# EAGLE board mega_pin_out___relay (EAGLE 7.7.0)
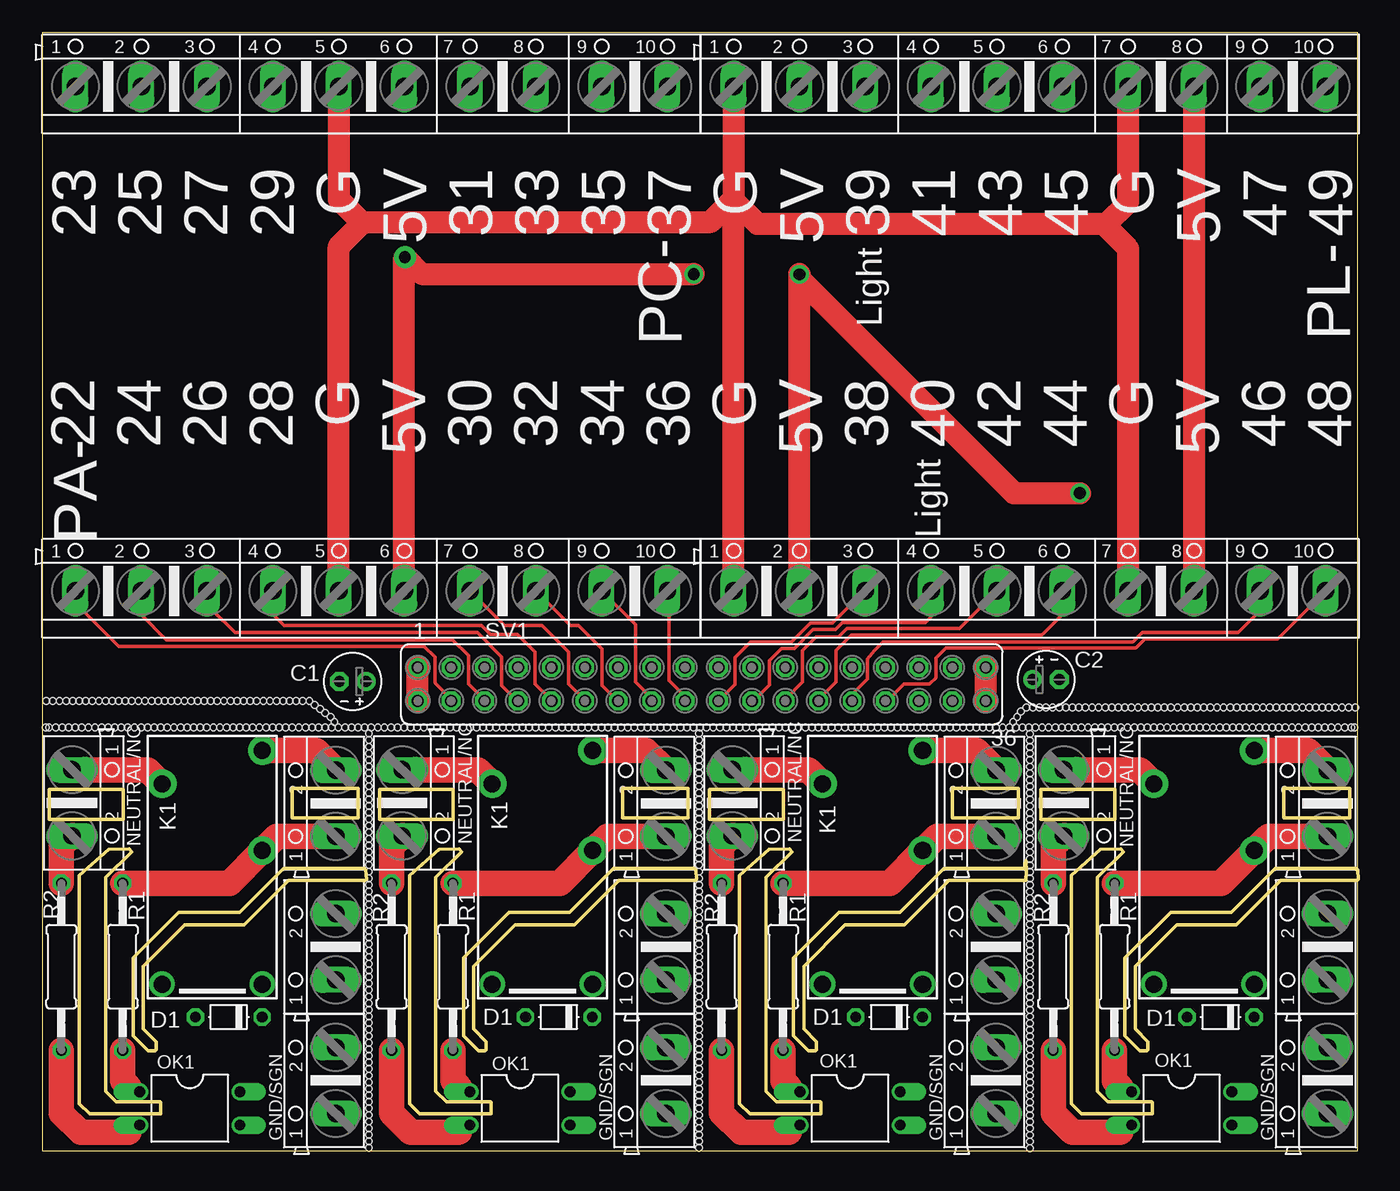
[diagram p0: board, top side]
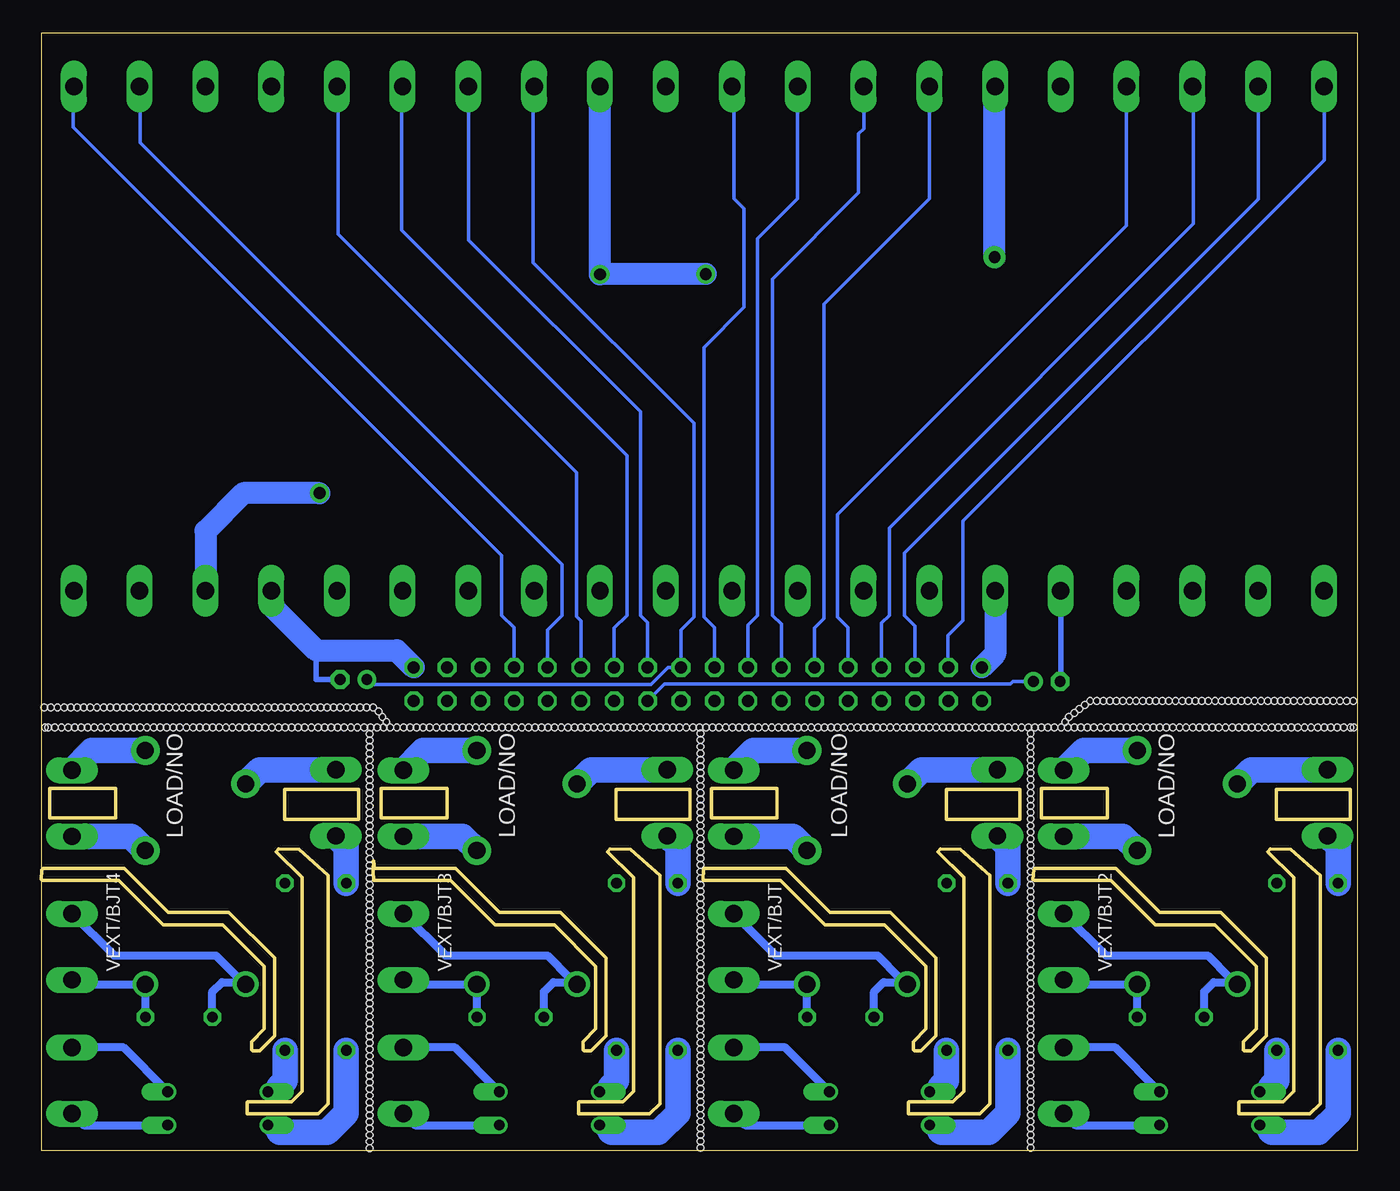
[diagram p1: board, bottom side, seen from below]

Size 100.03 x 85 mm. Coordinates in mm from the lower left corner, seen from the top.
Outline: 24.49,21.49 24.48,21.49
Outline: 24.48,21.49 18.33,21.49 14.98,18.14 10.37,18.14 6.91,14.68 6.91,8.74 8.05,7.6 8.56,7.6 8.64,7.68 8.64,8.31 7.68,9.27 7.68,14.04 10.83,17.19 15.35,17.19 18.73,20.57 24.55,20.57 24.63,20.65 24.59,21.38 24.48,21.49
Outline: 49.59,21.49 49.58,21.49
Outline: 49.58,21.49 43.43,21.49 40.08,18.14 35.47,18.14 32.01,14.68 32.01,8.74 33.15,7.6 33.66,7.6 33.74,7.68 33.74,8.31 32.78,9.27 32.78,14.04 35.93,17.19 40.45,17.19 43.83,20.57 49.65,20.57 49.73,20.65 49.69,21.38 49.58,21.49
Outline: 74.69,21.49 74.68,21.49
Outline: 74.68,21.49 68.53,21.49 65.18,18.14 60.57,18.14 57.11,14.68 57.11,8.74 58.25,7.6 58.76,7.6 58.84,7.68 58.84,8.31 57.88,9.27 57.88,14.04 61.03,17.19 65.55,17.19 68.93,20.57 74.75,20.57 74.81,21.31 74.77,22.04 74.68,21.49
Outline: 99.89,21.49 99.88,21.49
Outline: 99.88,21.49 93.73,21.49 90.38,18.14 85.77,18.14 82.31,14.68 82.31,8.74 83.45,7.6 83.96,7.6 84.04,7.68 84.04,8.31 83.08,9.27 83.08,14.04 86.23,17.19 90.75,17.19 94.13,20.57 99.95,20.57 100.03,20.65 99.99,21.38 99.88,21.49
Outline: 0,0 100,0 100,85 0,85 0,0
Outline: 0.52,27.5 0.52,25.22 6.14,25.21 6.14,27.49 0.52,27.5
Outline: 5.04,22.93 2.81,20.95 2.81,3.6 3.59,2.82 9,2.82 9,3.68 8.96,3.72 5.61,3.72 4.81,4.52 4.81,20.78 6.78,22.75 6.59,22.95 5.04,22.93
Outline: 18.99,27.55 23.99,27.55 23.99,25.32 18.99,25.32 18.99,27.55
Outline: 25.62,27.5 25.62,25.22 31.24,25.21 31.24,27.49 25.62,27.5
Outline: 30.14,22.93 27.91,20.95 27.91,3.6 28.69,2.82 34.1,2.82 34.1,3.68 34.06,3.72 30.71,3.72 29.91,4.52 29.91,20.78 31.88,22.75 31.69,22.95 30.14,22.93
Outline: 44.09,27.55 49.09,27.55 49.09,25.32 44.09,25.32 44.09,27.55
Outline: 50.72,27.5 50.72,25.22 56.34,25.21 56.34,27.49 50.72,27.5
Outline: 55.24,22.93 53.01,20.95 53.01,3.6 53.79,2.82 59.2,2.82 59.2,3.68 59.16,3.72 55.81,3.72 55.01,4.52 55.01,20.78 56.98,22.75 56.79,22.95 55.24,22.93
Outline: 69.19,27.55 74.19,27.55 74.19,25.32 69.19,25.32 69.19,27.55
Outline: 75.92,27.5 75.92,25.22 81.54,25.21 81.54,27.49 75.92,27.5
Outline: 80.44,22.93 78.21,20.95 78.21,3.6 78.99,2.82 84.4,2.82 84.4,3.68 84.36,3.72 81.01,3.72 80.21,4.52 80.21,20.78 82.18,22.75 81.99,22.95 80.44,22.93
Outline: 94.39,27.55 99.39,27.55 99.39,25.32 94.39,25.32 94.39,27.55
Copper layers (1*16): Top 0.035mm / dielectric 1.5mm / Bottom 0.035mm
Design rules "default": minimum track width 10mil, minimum drill 24mil, track to track 8mil, track to pad 8mil, pad to pad 8mil, via to via 8mil, smd to smd 8mil, copper to edge 40mil, drill to drill 8mil, minimum pad ring 10mil, minimum via ring 8mil, stop-mask expansion 4mil, vias tented up to drill 0mil, thermal gap 10mil
Holes 0.5 mm at 73.5,32.2 73.8,32.6 74.1,33 74.4,33.4 74.8,33.7 75.3,33.7 75.8,33.7 76.3,33.7 76.8,33.7 77.3,33.7 77.8,33.7 78.3,33.7 78.8,33.7 79.3,33.7 79.8,33.7 80.3,33.7 80.8,33.7 81.3,33.7 81.8,33.7 82.3,33.7 82.8,33.7 83.3,33.7 83.8,33.7 84.3,33.7 84.8,33.7 85.3,33.7 85.8,33.7 86.3,33.7 86.8,33.7 87.3,33.7 87.8,33.7 88.3,33.7 88.8,33.7 89.3,33.7 89.8,33.7 90.3,33.7 90.8,33.7 91.3,33.7 73,32.2 72.5,32.2 27,32.2 20.3,34.2 20.7,33.9 21.1,33.6 21.5,33.3 21.9,33 72,32.2 71.5,32.2 71,32.2 61,32.2 61.5,32.2 62,32.2 62.5,32.2 63,32.2 63.5,32.2 64,32.2 64.5,32.2 65,32.2 65.5,32.2 66,32.2 66.5,32.2 67,32.2 67.5,32.2 68,32.2 68.5,32.2 69,32.2 69.5,32.2 70,32.2 70.5,32.2 51,32.2 51.5,32.2 52,32.2 52.5,32.2 53,32.2 53.5,32.2 54,32.2 54.5,32.2 55,32.2 55.5,32.2 56,32.2 56.5,32.2 57,32.2 57.5,32.2 58,32.2 58.5,32.2 59,32.2 59.5,32.2 60,32.2 60.5,32.2 41,32.2 41.5,32.2 42,32.2 42.5,32.2 43,32.2 43.5,32.2 44,32.2 44.5,32.2 45,32.2 45.5,32.2 46,32.2 46.5,32.2 47,32.2 47.5,32.2 48,32.2 48.5,32.2 49,32.2 49.5,32.2 50,32.2 50.5,32.2 31,32.2 31.5,32.2 32,32.2 32.5,32.2 33,32.2 33.5,32.2 34,32.2 34.5,32.2 35,32.2 35.5,32.2 36,32.2 36.5,32.2 37,32.2 37.5,32.2 38,32.2 38.5,32.2 39,32.2 39.5,32.2 40,32.2 40.5,32.2 30.5,32.2 30,32.2 29.5,32.2 29,32.2 28.5,32.2 28,32.2 27.5,32.2 91.8,33.7 92.3,33.7 92.8,33.7 93.3,33.7 93.8,33.7 94.3,33.7 94.8,33.7 95.3,33.7 95.8,33.7 96.3,33.7 96.8,33.7 97.3,33.7 97.8,33.7 98.3,33.7 98.8,33.7 99.3,33.7 99.8,33.7 19.8,34.2 19.3,34.2 26.5,32.2 26,32.2 25.5,32.2 25,32.2 24.5,32.2 24,32.2 23.5,32.2 23,32.2 22.5,32.2 22.2,32.6 18.8,34.2 18.3,34.2 17.8,34.2 17.3,34.2 1.8,34.2 2.3,34.2 2.8,34.2 3.3,34.2 3.8,34.2 4.3,34.2 4.8,34.2 5.3,34.2 5.8,34.2 6.3,34.2 6.8,34.2 7.3,34.2 7.8,34.2 8.3,34.2 8.8,34.2 9.3,34.2 9.8,34.2 10.3,34.2 10.8,34.2 11.3,34.2 11.8,34.2 12.3,34.2 12.8,34.2 13.3,34.2 13.8,34.2 14.3,34.2 14.8,34.2 15.3,34.2 15.8,34.2 16.3,34.2 16.8,34.2 1.3,34.2 0.8,34.2 0.3,34.2 24.82,15.73 49.93,28.73 75.08,29.71 75.08,29.21 75.08,28.71 75.08,28.21 75.08,27.71 75.08,27.21 75.08,26.71 75.08,26.21 75.08,25.71 75.08,25.21 75.08,24.71 75.08,24.21 75.08,23.71 75.08,23.21 75.08,22.71 75.08,22.21 75.08,21.71 75.08,21.21 75.08,20.71 75.08,20.21 75.08,19.71 75.08,19.21 75.08,18.71 75.08,18.21 75.08,17.71 75.08,17.21 75.08,16.71 75.08,16.21 75.08,15.71 75.08,15.21 75.08,14.71 75.08,14.21 75.08,13.71 75.08,13.21 75.08,12.71 75.08,12.21 75.08,11.71 75.08,11.21 75.08,30.21 75.08,30.71 75.08,31.21 75.08,31.71 74,32.2 74.5,32.2 75,32.2 75.5,32.2 76.5,32.2 76,32.2 77,32.2 77.5,32.2 78,32.2 78.5,32.2 79.5,32.2 79,32.2 80,32.2 80.5,32.2 81,32.2 81.5,32.2 82.5,32.2 82,32.2 83,32.2 83.5,32.2 84,32.2 84.5,32.2 85.5,32.2 85,32.2 86,32.2 86.5,32.2 87,32.2 87.5,32.2 88.5,32.2 88,32.2 89,32.2 89.5,32.2 90,32.2 90.5,32.2 91.5,32.2 91,32.2 92,32.2 92.5,32.2 93,32.2 93.5,32.2 94.5,32.2 94,32.2 95,32.2 95.5,32.2 96,32.2 96.5,32.2 97.5,32.2 97,32.2 98,32.2 98.5,32.2 99,32.2 99.5,32.2 99.75,32.2 75.08,10.21 75.08,10.71 75.08,9.71 75.08,9.21 75.08,8.71 75.08,8.21 75.08,7.21 75.08,7.71 75.08,6.71 75.08,6.21 75.08,5.71 75.08,5.21 75.08,4.21 75.08,4.71 75.08,3.71 75.08,3.21 75.08,2.71 75.08,2.21 75.08,1.21 75.08,1.71 75.08,0.71 75.08,0.21 49.93,28.23 49.93,27.73 49.93,27.23 49.93,26.73 49.93,26.23 49.93,25.73 49.93,25.23 49.93,24.73 49.93,24.23 49.93,23.73 49.93,23.23 49.93,22.73 49.93,22.23 49.93,21.73 49.93,21.23 49.93,20.73 49.93,20.23 49.93,19.73 49.93,19.23 49.93,18.73 49.93,18.23 49.93,17.73 49.93,17.23 49.93,16.73 49.93,16.23 49.93,15.73 49.93,15.23 49.93,14.73 49.93,14.23 49.93,13.73 49.93,13.23 49.93,12.73 49.93,12.23 49.93,11.73 49.93,11.23 49.93,10.73 49.93,10.23 49.93,9.73 49.93,9.23 49.93,8.73 49.93,8.23 49.93,7.73 49.93,7.23 49.93,6.73 49.93,6.23 49.93,5.73 49.93,5.23 49.93,4.73 49.93,4.23 49.93,3.73 49.93,3.23 49.93,2.73 49.93,2.23 49.93,1.73 49.93,1.23 49.93,0.73 49.93,0.23 49.93,29.23 49.93,29.73 49.93,30.23 49.93,30.73 49.93,31.23 49.93,31.73 24.82,28.73 24.82,28.23 24.82,27.73 24.82,27.23 24.82,26.73 24.82,26.23 24.82,25.73 24.82,25.23 24.82,24.73 24.82,24.23 24.82,23.73 24.82,23.23 24.82,22.73 24.82,22.23 24.82,21.73 24.82,21.23 24.82,20.73 24.82,20.23 24.82,19.73 24.82,19.23 24.82,18.73 24.82,18.23 24.82,17.73 24.82,17.23 24.82,16.73 24.82,16.23 24.82,29.23 24.82,29.73 24.82,30.23 24.82,30.73 24.82,31.23 24.82,31.73 24.82,12.23 24.82,11.73 24.82,11.23 24.82,10.73 24.82,10.23 24.82,9.73 24.82,9.23 24.82,8.73 24.82,8.23 24.82,7.73 24.82,7.23 24.82,6.73 24.82,6.23 24.82,5.73 24.82,5.23 24.82,4.73 24.82,4.23 24.82,3.73 24.82,3.23 24.82,2.73 24.82,2.23 24.82,1.73 24.82,1.23 24.82,0.73 24.82,0.23 24.82,12.73 24.82,13.23 24.82,13.73 24.82,14.23 24.82,14.73 24.82,15.23 18,32.2 14,32.2 13.5,32.2 13,32.2 12.5,32.2 12,32.2 11.5,32.2 11,32.2 10.5,32.2 10,32.2 9.5,32.2 9,32.2 8.5,32.2 8,32.2 7.5,32.2 7,32.2 6.5,32.2 14.5,32.2 15,32.2 15.5,32.2 16,32.2 16.5,32.2 17,32.2 17.5,32.2 18.5,32.2 19,32.2 19.5,32.2 20,32.2 20.5,32.2 21,32.2 21.5,32.2 22,32.2 6,32.2 5.5,32.2 5,32.2 4.5,32.2 4,32.2 3.5,32.2 3,32.2 2.5,32.2 2,32.2 1.5,32.2 1,32.2 0.5,32.2 0.25,32.2

## Footprints (pad centres in the part's own frame; a part is rotated, then mirrored left to right if it is on the bottom)
E2-4 = drill 0.813 pad 1.422: + -1.016,0 | drill 0.813 pad 1.422 octagon: - 1.016,0
D-5 = drill 0.813 octagon: A 2.54,0; C -2.54,0
AK500/2 = drill 1.321 long: 1 -2.515,0; 2 2.515,0
G5SB = drill 1.3 pad 1.93: 1 7.62,3.81; 5 7.62,-3.81 | drill 1.3 pad 2.184: 2 -2.54,3.81; 3 -10.16,3.81; 4 -7.62,-3.81
DIL04 = drill 0.813 offset: 1 -1.27,-3.81; 2 1.27,-3.81; 3 1.27,3.81; 4 -1.27,3.81
0207/12 = drill 0.813 octagon: 1 -6.35,0; 2 6.35,0
FE18-2 = drill 0.914: 1 -21.59,1.27 | drill 0.914 octagon: 2 -21.59,-1.27; 3 -19.05,1.27; 4 -19.05,-1.27; 5 -16.51,1.27; 6 -16.51,-1.27; 7 -13.97,1.27; 8 -13.97,-1.27; 9 -11.43,1.27; 10 -11.43,-1.27; 11 -8.89,1.27; 12 -8.89,-1.27; 13 -6.35,1.27; 14 -6.35,-1.27; 15 -3.81,1.27; 16 -3.81,-1.27; 17 -1.27,1.27; 18 -1.27,-1.27; 19 1.27,1.27; 20 1.27,-1.27; 21 3.81,1.27; 22 3.81,-1.27; 23 6.35,1.27; 24 6.35,-1.27; 25 8.89,1.27; 26 8.89,-1.27; 27 11.43,1.27; 28 11.43,-1.27; 29 13.97,1.27; 30 13.97,-1.27; 31 16.51,1.27; 32 16.51,-1.27; 33 19.05,1.27; 34 19.05,-1.27; 35 21.59,1.27; 36 21.59,-1.27
AK500/10 = drill 1.321 long: 1 -22.504,0; 2 -17.501,0; 3 -12.497,0; 4 -7.493,0; 5 -2.489,0; 6 2.489,0; 7 7.493,0; 8 12.497,0; 9 17.501,0; 10 22.504,0

## Placement (x,y rotation side)
C1  1uF  [E2-4]  23.6,35.69 180 top
C2  1uF  [E2-4]  76.3,35.84 0 top
D1  1N4007  [D-5]  39.27,10.18 180 top
D2  1N4007  [D-5]  64.37,10.18 180 top
D3  1N4007  [D-5]  14.17,10.18 180 top
D4  1N4007  [D-5]  89.57,10.18 180 top
GND/S1  [AK500/2]  47.4,5.35 90 top
GND/S2  [AK500/2]  22.3,5.35 90 top
GND/S3  [AK500/2]  72.5,5.35 90 top
GND/S4  [AK500/2]  97.7,5.35 90 top
K1  G5Q-1-EU DC12  [G5SB]  38.01,20.29 270 top
K2  G5Q-1-EU DC12  [G5SB]  63.11,20.29 270 top
K3  G5Q-1-EU DC12  [G5SB]  12.91,20.29 270 top
K4  G5Q-1-EU DC12  [G5SB]  88.31,20.29 270 top
LOAD/NO1  [AK500/2]  47.4,26.43 90 top
LOAD/NO2  [AK500/2]  22.3,26.43 90 top
LOAD/NO3  [AK500/2]  72.5,26.43 90 top
LOAD/NO4  [AK500/2]  97.7,26.43 90 top
NEUTRAL/NC  [AK500/2]  52.45,26.46 270 top
NEUTRAL/NC1  [AK500/2]  27.35,26.46 270 top
NEUTRAL/NC2  [AK500/2]  2.25,26.46 270 top
NEUTRAL/NC4  [AK500/2]  77.65,26.46 270 top
OK1  SFH620A  [DIL04]  36.31,3.23 270 top
OK2  SFH620A  [DIL04]  61.41,3.23 270 top
OK3  SFH620A  [DIL04]  11.21,3.23 270 top
OK4  SFH620A  [DIL04]  86.61,3.23 270 top
R1  22k/2W  [0207/12]  31.2,14 270 top
R2  22k/2W  [0207/12]  26.54,14 270 top
R3  22k/2W  [0207/12]  56.3,14 270 top
R4  22k/2W  [0207/12]  51.64,14 270 top
R5  22k/2W  [0207/12]  6.11,14 270 top
R6  22k/2W  [0207/12]  1.44,14 270 top
R7  22k/2W  [0207/12]  81.5,14 270 top
R8  22k/2W  [0207/12]  76.84,14 270 top
SV1  [FE18-2]  50.13,35.48 0 top
VEXT/BJT  [AK500/2]  47.4,15.52 90 top
VEXT/BJT2  [AK500/2]  22.3,15.52 90 top
VEXT/BJT3  [AK500/2]  72.5,15.52 90 top
VEXT/BJT4  [AK500/2]  97.7,15.52 90 top
X2  [AK500/10]  25.02,80.92 0 top
X3  [AK500/10]  75.06,80.92 0 top
X4  [AK500/10]  25.02,42.58 0 top
X5  [AK500/10]  75.06,42.58 0 top

## Library data of the parts
C1 C2 = adafruit
D1-D4 = diode
GND/S1-GND/S4 LOAD/NO1-LOAD/NO4 NEUTRAL/NC NEUTRAL/NC1 NEUTRAL/NC2 NEUTRAL/NC4 VEXT/BJT VEXT/BJT2-VEXT/BJT4 = con-ptr500-modified; OC_FARNELL: unknown; OC_NEWARK: unknown
K1-K4 = relay; OC_FARNELL: unknown; OC_NEWARK: unknown
OK1-OK4 = optocoupler; MPN: SFH620A-2; OC_FARNELL: 1469594; OC_NEWARK: 97K9546
R1-R8 = rcl
SV1 = con-lsta; OC_FARNELL: unknown; OC_NEWARK: unknown
X2-X5 = con-ptr500; OC_FARNELL: unknown; OC_NEWARK: unknown

## Nets
5V: SV1.1 SV1.2 X2.6 X3.2 X3.8 X4.6 X5.2 X5.8
GND: C1.- C2.- SV1.35 SV1.36 X2.5 X3.1 X3.7 X4.5 X5.1 X5.7
I31: SV1.11 X2.7
I33: SV1.13 X2.8
I35: SV1.15 X2.9
I47: SV1.27 X3.9
I49: SV1.29 X3.10
N$1: C2.+ SV1.19 X3.3
N$2: SV1.20 X5.3
N$3: SV1.3 X2.1
N$4: SV1.5 X2.2
N$5: K3.2 LOAD/NO2.1 R5.1
N$6: NEUTRAL/NC2.2 R6.1
N$7: K3.4 NEUTRAL/NC2.1
N$8: OK3.2 R6.2
N$9: SV1.7 X2.3
N$10: SV1.9 X2.4
N$11: SV1.17 X2.10
N$12: D3.C K3.1 VEXT/BJT2.1
N$13: SV1.21 X3.4
N$14: SV1.23 X3.5
N$15: SV1.25 X3.6
N$16: SV1.4 X4.1
N$17: SV1.6 X4.2
N$18: SV1.8 X4.3
N$19: SV1.10 X4.4
N$20: SV1.12 X4.7
N$21: SV1.14 X4.8
N$22: SV1.16 X4.9
N$23: SV1.18 X4.10
N$24: C1.+ SV1.22 X5.4
N$25: OK3.1 R5.2
N$26: SV1.24 X5.5
N$27: SV1.26 X5.6
N$28: SV1.28 X5.9
N$29: SV1.30 X5.10
N$30: D3.A K3.5 VEXT/BJT2.2
N$31: K3.3 LOAD/NO2.2
N$32: GND/S2.2 OK3.4
N$33: GND/S2.1 OK3.3
N$34: K1.2 LOAD/NO1.1 R1.1
N$35: NEUTRAL/NC1.2 R2.1
N$36: K1.4 NEUTRAL/NC1.1
N$37: OK1.2 R2.2
N$38: OK1.1 R1.2
N$39: D1.C K1.1 VEXT/BJT.1
N$40: D1.A K1.5 VEXT/BJT.2
N$41: K1.3 LOAD/NO1.2
N$42: GND/S1.2 OK1.4
N$43: GND/S1.1 OK1.3
N$44: K2.2 LOAD/NO3.1 R3.1
N$45: NEUTRAL/NC.2 R4.1
N$46: K2.4 NEUTRAL/NC.1
N$47: OK2.2 R4.2
N$48: OK2.1 R3.2
N$49: D2.C K2.1 VEXT/BJT3.1
N$50: D2.A K2.5 VEXT/BJT3.2
N$51: K2.3 LOAD/NO3.2
N$52: GND/S3.2 OK2.4
N$53: GND/S3.1 OK2.3
N$54: K4.2 LOAD/NO4.1 R7.1
N$55: NEUTRAL/NC4.2 R8.1
N$56: K4.4 NEUTRAL/NC4.1
N$57: OK4.2 R8.2
N$58: OK4.1 R7.2
N$59: D4.C K4.1 VEXT/BJT4.1
N$60: D4.A K4.5 VEXT/BJT4.2
N$61: K4.3 LOAD/NO4.2
N$62: GND/S4.2 OK4.4
N$63: GND/S4.1 OK4.3

## Tracks (layer width: path | path; a pad name or v marks a point on that pad's centre or on a via)
5V  (via drill 0.89 pad 1.42, 0.89 pad 1.68)
  Top 1.016: 27.51,67.89 v27.56,67.94
  Top 1.676: SV1.2 SV1.1 | X4.6 27.51,67.89 | v57.56,66.65 57.53,66.67 | X3.8 X5.8 | v27.56,67.94 28.83,66.67 49.51,66.67 v49.53,66.66 | X5.2 v57.56,66.65 | v57.56,66.65 57.56,66.31 73.86,50.01 76.7,50.01 v78.88,50.01
  Bottom 1.016: 27.56,80.87 X2.6 | 57.53,80.9 X3.2
  Bottom 1.676: X4.6 27.51,37.78 SV1.1 | v27.56,67.94 27.56,80.87 | X3.2 57.56,66.7 57.53,66.67 v57.56,66.65 57.55,66.66 v49.53,66.66 | X5.8 87.55,47.14 84.68,50.01 v78.88,50.01
GND
  Top 1.016: 24.26,70.61 24.38,70.61 | 52.58,72.39 52.39,72.2 52.55,72.03 | 52.58,80.9 X3.1 52.55,72.29 | 80.64,70.48 80.9,70.48
  Top 1.676: X2.5 22.53,72.34 24.26,70.61 | 52.39,72.2 50.8,70.61 24.38,70.61 22.53,68.76 X4.5 | 52.58,72.39 52.58,80.9 | 52.55,72.29 54.36,70.48 80.64,70.48 82.55,68.58 X5.7 | 80.9,70.48 82.55,72.14 X3.7 | SV1.36 SV1.35 | X5.1 52.55,72.03
  Bottom 0.406: C2.- 79.12,35.84 79.12,38.05 | C1.- 22.53,35.69 X4.5
  Bottom 1.676: X5.7 82.55,41.48 79.12,38.05 73.01,38.05 SV1.35
I31
  Bottom 0.254: SV1.11 41.24,39.74 40.51,40.46 40.51,64.39 32.51,72.39 X2.7
I33
  Bottom 0.254: SV1.13 43.78,40.04 44.45,40.72 44.45,66.29 37.9,72.85 37.9,77.32 37.49,77.72 37.49,80.06 37.52,80.09 X2.8 37.47,80.87
I35
  Bottom 0.254: SV1.15 46.32,39.99 45.59,40.72 45.59,69.34 42.55,72.39 42.55,80.9 X2.9
I47
  Bottom 0.254: SV1.27 61.56,39.61 60.45,40.72 60.45,44.57 92.53,76.65 92.53,80.89 X3.9
I49
  Bottom 0.254: SV1.29 64.1,39.79 65.02,40.72 65.02,45.27 97.59,77.83 97.59,80.9 X3.10
N$1
  Bottom 0.254: C2.+ 74.92,35.48 53.68,35.48 52.4,36.76 SV1.19 51.4,39.61 50.42,40.59 50.42,55.32 62.64,67.54 62.64,80.85 X3.3
N$2
  Top 0.254: X5.3 62.49,42.57 60.06,40.14 58.38,40.14 56.95,38.71 53.84,38.71 52.64,37.51 52.64,35.46 SV1.20
N$3
  Bottom 0.254: SV1.3 31.11,36.79 31.11,39.19 29.97,40.34 29.97,47.88 2.52,75.34 X2.1
N$4
  Bottom 0.254: SV1.5 33.62,39.92 34.42,40.72 34.42,45.47 7.52,72.36 X2.2 7.49,80.9
N$5
  Top 1.93: LOAD/NO2.1 17.81,23.91 16.85,22.95 | R5.1 14.24,20.35 K3.2
  Bottom 1.93: LOAD/NO2.1 17.8,23.91 K3.2
N$6
  Top 1.93: R6.1 1.44,23.14 2.3,24
  Bottom 1.93: R6.1 1.44,23.14 NEUTRAL/NC2.2
N$7
  Top 1.93: NEUTRAL/NC2.1 8.02,28.98 9.05,27.95
  Bottom 1.93: NEUTRAL/NC2.1 8.04,28.98 K3.4
N$8
  Top 1.016: 6.6,1.45 6.8,1.45 7.3,1.95
  Top 1.93: R6.2 1.44,2.86 2.9,1.4 6.55,1.4 6.6,1.45
  Bottom 1.27: 6.6,1.5 6.94,1.5 OK3.2
  Bottom 1.93: R6.2 1.44,2.86 2.9,1.4 6.5,1.4 6.6,1.5
N$9
  Bottom 0.254: X2.3 12.57,80.87 12.57,80.42 12.45,80.29 12.45,70.48 35.56,47.37 35.56,40.72 36.16,40.12 SV1.7
N$10
  Bottom 0.254: SV1.9 38.7,39.79 39.5,40.59 39.5,48.39 17.53,70.36 X2.4
N$11
  Bottom 0.254: SV1.17 48.86,39.79 49.66,40.59 49.66,61.09 46.61,64.14 46.61,71.63 47.37,72.39 47.37,80.77 X2.10 47.5,80.9
N$12
  Bottom 0.61: VEXT/BJT2.1 21.97,12.67 K3.1 16.71,12.66 D3.C
N$13
  Bottom 0.254: 53.94,36.64 SV1.21 53.94,40.17 54.48,40.72 54.48,56.21 67.53,69.26 67.53,80.89 X3.4
N$14
  Bottom 0.254: SV1.23 56.48,39.74 55.5,40.72 55.5,52.86 72.63,69.99 72.63,81.5 72.79,81.65 72.79,81.14 X3.5
N$15
  Bottom 0.254: SV1.25 59.02,40.3 59.35,40.63 59.35,51.59 77.47,69.71 77.47,80.85 X3.6
N$16
  Top 0.254: SV1.4 31.08,34.33 29.84,35.56 29.84,37.54 29.03,38.35 5.82,38.35 2.52,41.66 X4.1
N$17
  Top 0.254: SV1.6 33.62,34.28 32.38,35.51 32.38,37.67 31.19,38.86 9.42,38.86 7.52,40.77 X4.2
N$18
  Top 0.254: SV1.8 36.09,34.21 34.92,35.38 34.92,37.54 33.07,39.4 14.66,39.4 13.03,41.02 12.52,41.02 X4.3
N$19
  Top 0.254: SV1.10 38.7,34.28 37.47,35.51 37.47,37.92 36.12,39.27 34.06,39.27 33.4,39.93 18.36,39.93 17.53,40.77 X4.4
N$20
  Top 0.254: SV1.12 41.24,34.28 40.01,35.51 40.01,37.92 37.97,39.95 35.13,39.95 X4.7
N$21
  Top 0.254: SV1.14 43.71,34.21 42.55,35.38 42.55,38.18 40.77,39.95 40.14,39.95 X4.8
N$22
  Top 0.254: SV1.16 46.32,34.4 45.09,35.64 45.09,40.01 X4.9
N$23
  Top 0.254: SV1.18 48.86,34.53 47.62,35.76 47.62,42.47 X4.10
N$24
  Top 0.254: SV1.22 54.07,34.21 55.28,35.42 55.28,37.28 56.2,38.2 57.16,38.2 58.59,39.63 60.28,39.63 60.84,40.19 67.14,40.19 67.56,40.61 X5.4
  Bottom 0.254: C1.+ 26.16,35.69 26.36,35.48 52.67,35.48 SV1.22
N$25
  Top 0.61: 6.6,4.85 7.05,4.85 OK3.1
  Top 1.93: R5.2 6.11,5.34 6.6,4.85
  Bottom 0.61: 6.6,4.85 7.05,4.85 OK3.1
  Bottom 1.93: R5.2 6.11,5.34 6.6,4.85
N$26
  Top 0.254: SV1.24 56.48,34.33 57.78,35.64 57.78,38.05 58.8,39.06 60.5,39.06 61.16,39.73 69.72,39.73 X5.5
N$27
  Top 0.254: SV1.26 59.02,34.33 60.33,35.64 60.33,38.05 61.49,39.22 76,39.22 77.55,40.77 X5.6
N$28
  Top 0.254: SV1.28 61.56,34.71 62.74,35.89 62.74,37.41 63.25,38.05 63.91,38.71 82.91,38.71 83.62,39.42 90.93,39.42 92.56,41.05 X5.9
N$29
  Top 0.254: SV1.30 64.24,34.21 65.51,35.48 67.44,35.48 67.92,35.97 67.92,37.49 68.68,38.25 83.13,38.25 83.82,38.94 93.92,38.94 X5.10
N$30
  Bottom 0.61: VEXT/BJT2.2 22.28,18.03 19.1,14.85 11.36,14.85 9.68,13.17 9.68,12.82 | D3.A 11.63,12.09 10.9,12.82 9.68,12.82 | 9.68,12.82 9.25,12.82 K3.5
N$31
  Top 1.93: K3.3 20.8,30.45 LOAD/NO2.2
  Bottom 1.93: K3.3 20.79,30.45 LOAD/NO2.2
N$32
  Bottom 0.61: OK3.4 18.38,7.87 GND/S2.2
N$33
  Bottom 0.61: GND/S2.1 21.42,1.96 OK3.3
N$34
  Top 1.93: LOAD/NO1.1 42.91,23.91 41.95,22.95 | R1.1 39.34,20.35 K1.2
  Bottom 1.93: LOAD/NO1.1 42.9,23.91 K1.2
N$35
  Top 1.93: R2.1 26.54,23.14 27.4,24
  Bottom 1.93: R2.1 26.54,23.14 NEUTRAL/NC1.2
N$36
  Top 1.93: NEUTRAL/NC1.1 33.12,28.98 34.15,27.95
  Bottom 1.93: NEUTRAL/NC1.1 33.14,28.98 K1.4
N$37
  Top 1.016: 31.7,1.45 31.9,1.45 32.4,1.95
  Top 1.93: R2.2 26.54,2.86 28,1.4 31.65,1.4 31.7,1.45
  Bottom 1.27: 31.7,1.5 32.04,1.5 OK1.2
  Bottom 1.93: R2.2 26.54,2.86 28,1.4 31.6,1.4 31.7,1.5
N$38
  Top 0.61: 31.7,4.85 32.15,4.85 OK1.1
  Top 1.93: R1.2 31.2,5.34 31.7,4.85
  Bottom 0.61: 31.7,4.85 32.15,4.85 OK1.1
  Bottom 1.93: R1.2 31.2,5.34 31.7,4.85
N$39
  Bottom 0.61: VEXT/BJT.1 47.07,12.67 K1.1 41.81,12.66 D1.C
N$40
  Bottom 0.61: VEXT/BJT.2 47.38,18.03 44.2,14.85 36.46,14.85 34.78,13.17 34.78,12.82 | D1.A 36.73,12.09 36,12.82 34.78,12.82 | 34.78,12.82 34.35,12.82 K1.5
N$41
  Top 1.93: K1.3 45.9,30.45 LOAD/NO1.2
  Bottom 1.93: K1.3 45.89,30.45 LOAD/NO1.2
N$42
  Bottom 0.61: OK1.4 43.48,7.87 GND/S1.2
N$43
  Bottom 0.61: GND/S1.1 46.52,1.96 OK1.3
N$44
  Top 1.93: LOAD/NO3.1 68.01,23.91 67.05,22.95 | R3.1 64.44,20.35 K2.2
  Bottom 1.93: LOAD/NO3.1 68,23.91 K2.2
N$45
  Top 1.93: R4.1 51.64,23.14 52.5,24
  Bottom 1.93: R4.1 51.64,23.14 NEUTRAL/NC.2
N$46
  Top 1.93: NEUTRAL/NC.1 58.22,28.98 59.25,27.95
  Bottom 1.93: NEUTRAL/NC.1 58.24,28.98 K2.4
N$47
  Top 1.016: 56.8,1.45 57,1.45 57.5,1.95
  Top 1.93: R4.2 51.64,2.86 53.1,1.4 56.75,1.4 56.8,1.45
  Bottom 1.27: 56.8,1.5 57.14,1.5 OK2.2
  Bottom 1.93: R4.2 51.64,2.86 53.1,1.4 56.7,1.4 56.8,1.5
N$48
  Top 0.61: 56.8,4.85 57.25,4.85 OK2.1
  Top 1.93: R3.2 56.3,5.34 56.8,4.85
  Bottom 0.61: 56.8,4.85 57.25,4.85 OK2.1
  Bottom 1.93: R3.2 56.3,5.34 56.8,4.85
N$49
  Bottom 0.61: VEXT/BJT3.1 72.17,12.67 K2.1 66.91,12.66 D2.C
N$50
  Bottom 0.61: VEXT/BJT3.2 72.48,18.03 69.3,14.85 61.56,14.85 59.88,13.17 59.88,12.82 | D2.A 61.83,12.09 61.1,12.82 59.88,12.82 | 59.88,12.82 59.45,12.82 K2.5
N$51
  Top 1.93: K2.3 71,30.45 LOAD/NO3.2
  Bottom 1.93: K2.3 70.99,30.45 LOAD/NO3.2
N$52
  Bottom 0.61: OK2.4 68.58,7.87 GND/S3.2
N$53
  Bottom 0.61: GND/S3.1 71.62,1.96 OK2.3
N$54
  Top 1.93: LOAD/NO4.1 93.21,23.91 92.25,22.95 | R7.1 89.64,20.35 K4.2
  Bottom 1.93: LOAD/NO4.1 93.2,23.91 K4.2
N$55
  Top 1.93: R8.1 76.84,23.14 77.7,24
  Bottom 1.93: R8.1 76.84,23.14 NEUTRAL/NC4.2
N$56
  Top 1.93: NEUTRAL/NC4.1 83.42,28.98 84.45,27.95
  Bottom 1.93: NEUTRAL/NC4.1 83.44,28.98 K4.4
N$57
  Top 1.016: 82,1.45 82.2,1.45 82.7,1.95
  Top 1.93: R8.2 76.84,2.86 78.3,1.4 81.95,1.4 82,1.45
  Bottom 1.27: 82,1.5 82.34,1.5 OK4.2
  Bottom 1.93: R8.2 76.84,2.86 78.3,1.4 81.9,1.4 82,1.5
N$58
  Top 0.61: 82,4.85 82.45,4.85 OK4.1
  Top 1.93: R7.2 81.5,5.34 82,4.85
  Bottom 0.61: 82,4.85 82.45,4.85 OK4.1
  Bottom 1.93: R7.2 81.5,5.34 82,4.85
N$59
  Bottom 0.61: VEXT/BJT4.1 97.37,12.67 K4.1 92.11,12.66 D4.C
N$60
  Bottom 0.61: VEXT/BJT4.2 97.68,18.03 94.5,14.85 86.76,14.85 85.08,13.17 85.08,12.82 | D4.A 87.03,12.09 86.3,12.82 85.08,12.82 | 85.08,12.82 84.65,12.82 K4.5
N$61
  Top 1.93: K4.3 96.2,30.45 LOAD/NO4.2
  Bottom 1.93: K4.3 96.19,30.45 LOAD/NO4.2
N$62
  Bottom 0.61: OK4.4 93.78,7.87 GND/S4.2
N$63
  Bottom 0.61: GND/S4.1 96.82,1.96 OK4.3

## Text on the board
tNames: 23 / 25 / 27 / 29 / G / 5V / 31 / 33 / 35 / 37 / G / 5V / 39 / 41 / 43 / 45 / G / 5V / 47 / 49 | PC- | Light | PL- | 22 / 24 / 26 / 28 / G / 5V / 30 / 32 / 34 / 36 / G / 5V / 38 / 40 / 42 / 44 / G / 5V / 46 / 48 | PA- | Light | K1 | K1 | K1 | NEUTRAL/NC | NEUTRAL/NC | NEUTRAL/NC | NEUTRAL/NC | R2 | R1 | R2 | R1 | R2 | R1 | R2 | R1 | D1 | D1 | D1 | D1 | GND/SGN | GND/SGN | GND/SGN | GND/SGN | OK1 | OK1 | OK1 | OK1
bNames: LOAD/NO | LOAD/NO | LOAD/NO | LOAD/NO